# Altium PCB AAS_touch_board_rev1_0.PcbDoc
Units mm, origin at the board's own origin, x right, y up, seen from the top; angles counter-clockwise.
Board outline 59.53 x 59.4 mm, 2 copper layers (Component Side, Bottom Layer), stack 0.971 mm thick; 5 components, 7 nets, 12 pads, 4 vias.
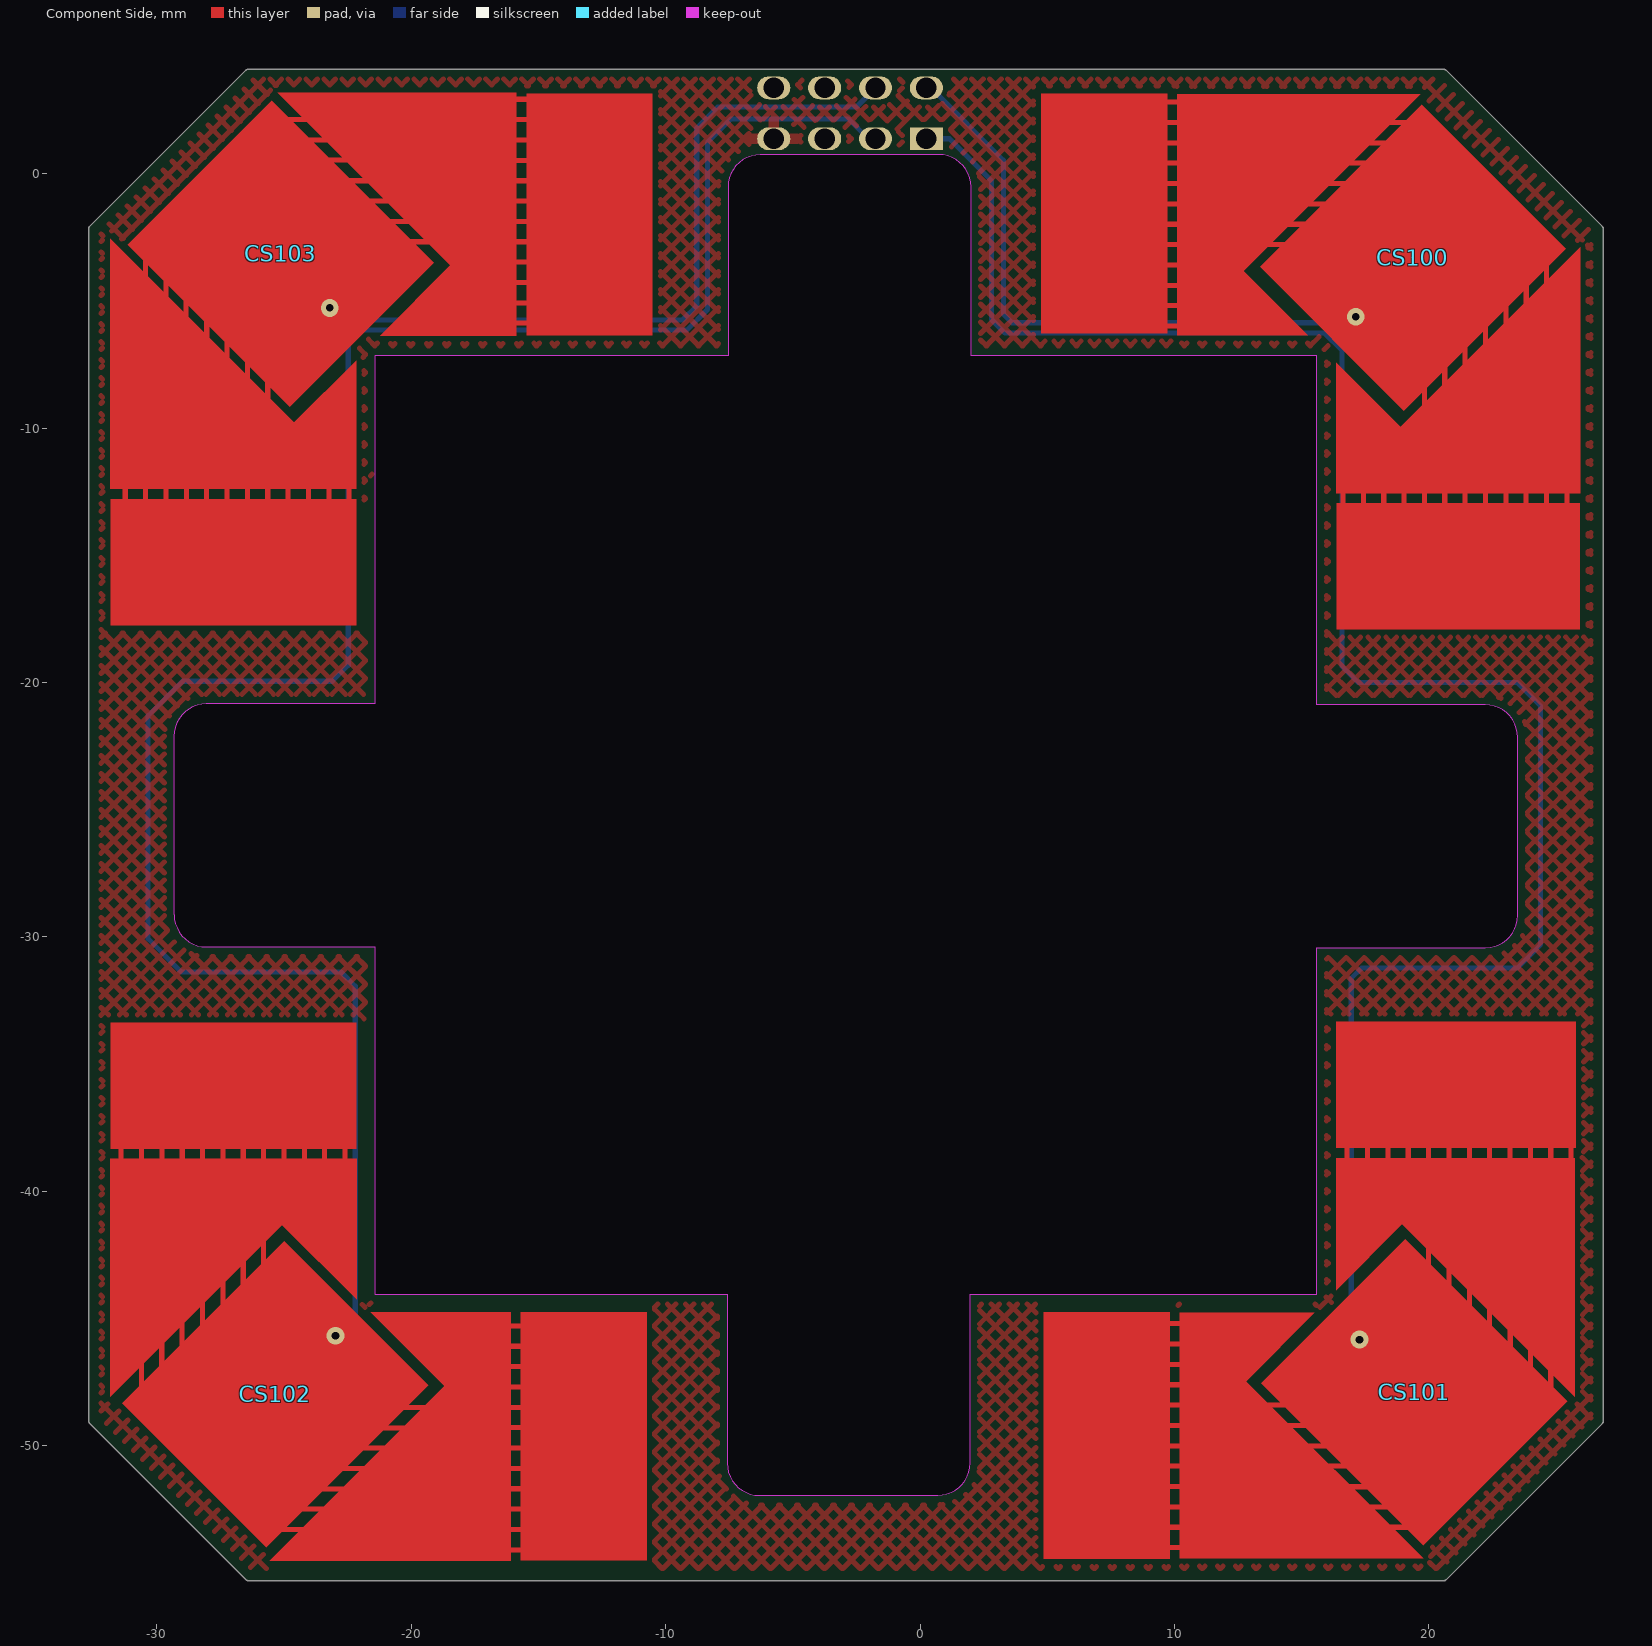
[diagram p0: Component Side view]
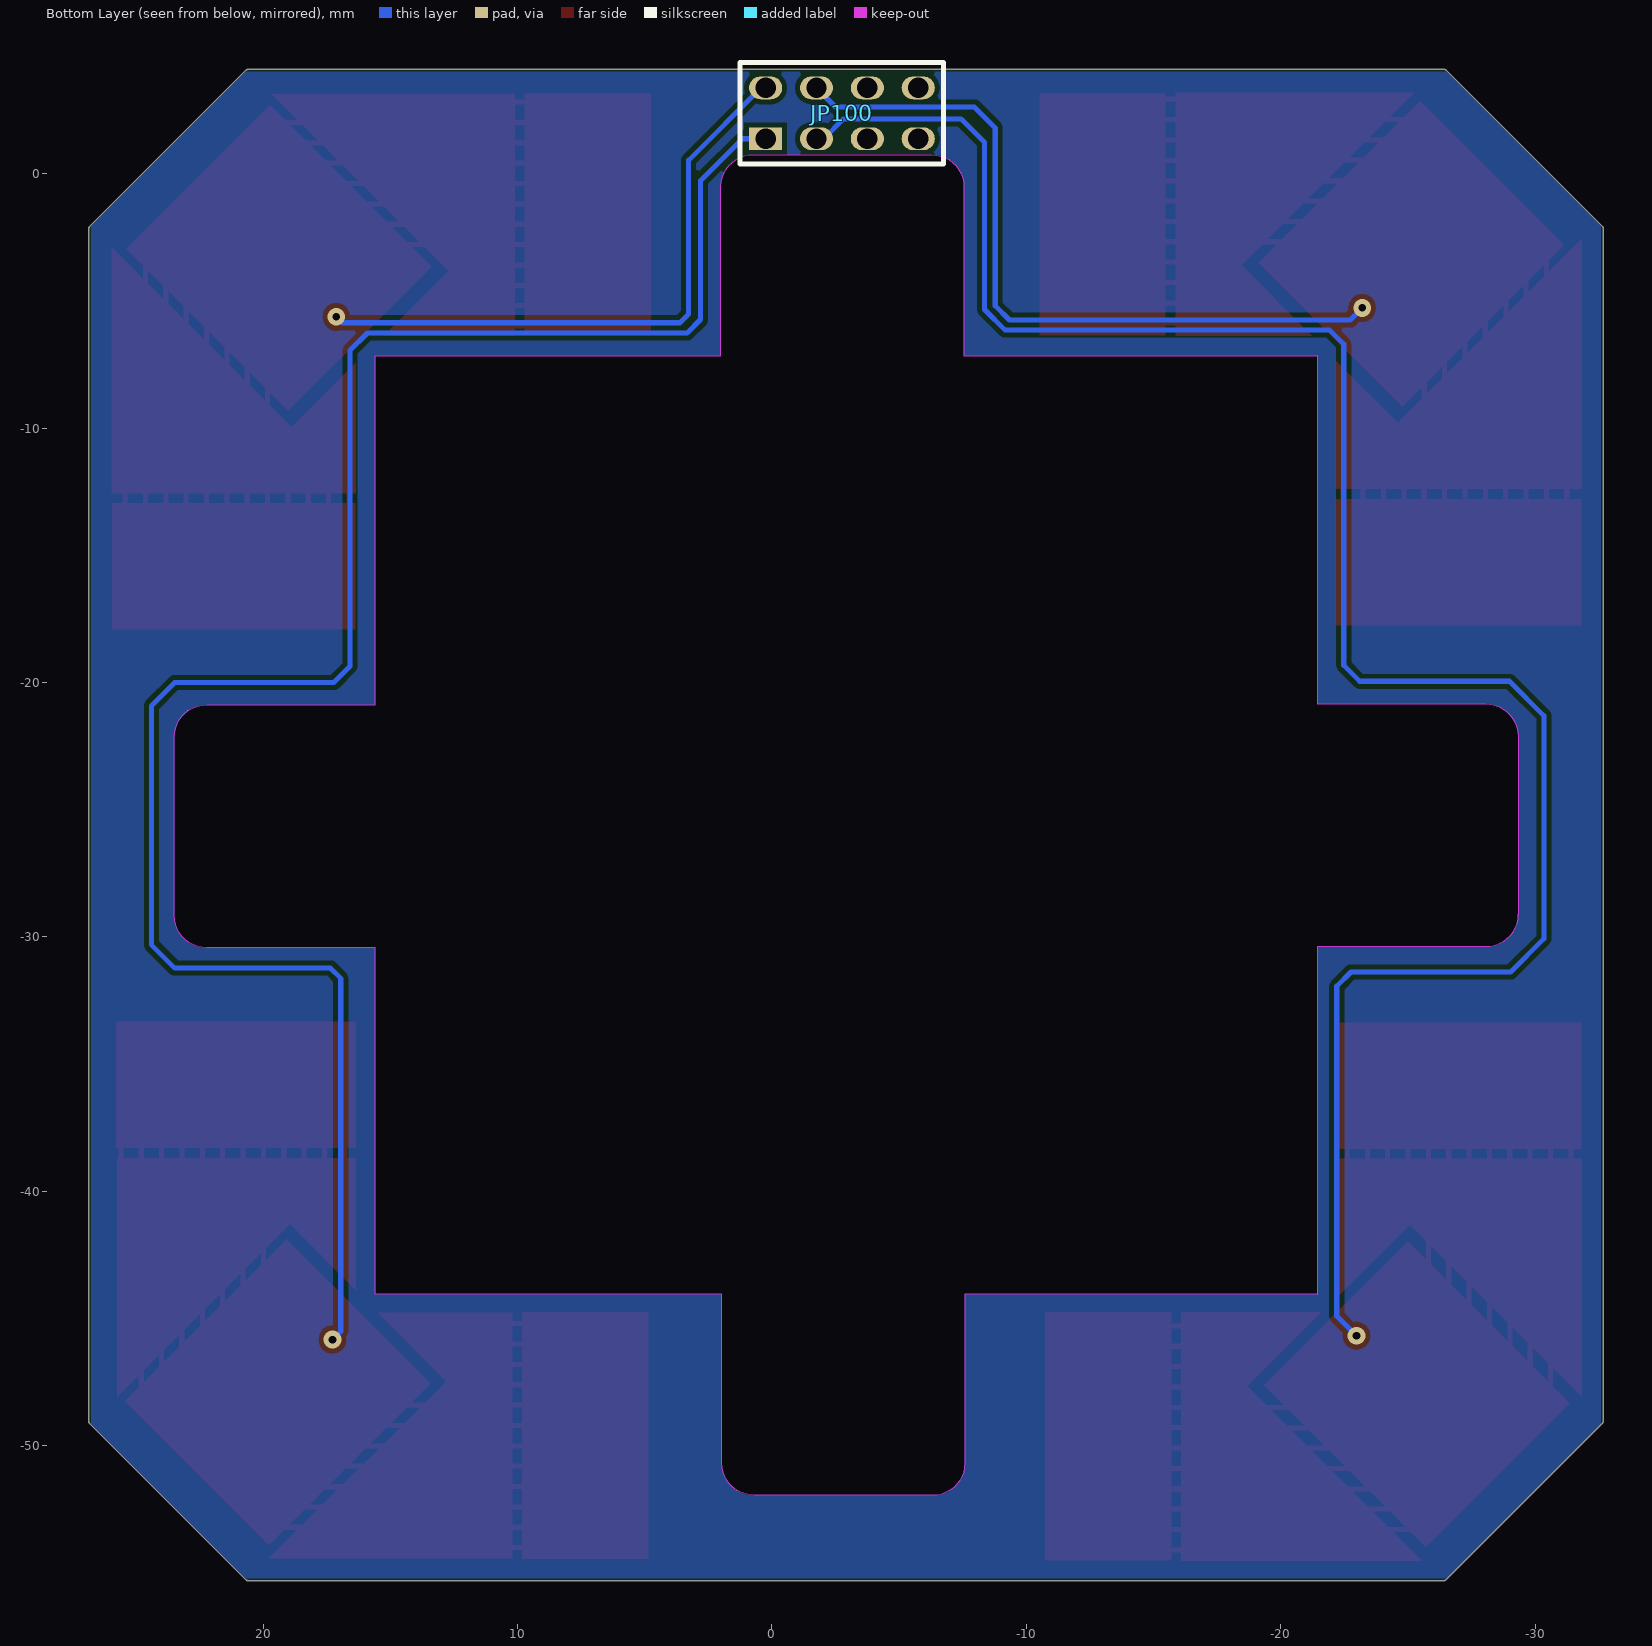
[diagram p1: Bottom Layer view, seen from below]

## Layer stack, top to bottom
Top Solder: solder mask 0.0102, Solder Resist, Dk 3.5
Component Side: signal copper 0.0356
Dielectric 1: core 0.9, FR-4, Dk 4.2
Bottom Layer: signal copper 0.0356
Solder Side: solder mask 0.0102, Solder Resist, Dk 3.5

## Board outline
-32.67,-22.751 cw(c-32.57,-22.75) -32.67,-22.75 -32.67,-7.181 cw(c-32.575,-7.15) -32.675,-7.15 -32.675,-2.151 cw(c-32.575,-2.15) -32.646,-2.079 -26.496,4.071 cw(c-26.425,4) -26.425,4.1 -21.425,4.1 cw(c-21.425,4) -21.423,4.1 cw(c-21.42,4) -21.42,4.1 20.599,4.1 cw(c20.6,4) 20.671,4.071 26.821,-2.079 cw(c26.75,-2.15) 26.85,-2.15 26.85,-7.15 cw(c26.75,-7.15) 26.85,-7.153 cw(c26.75,-7.155) 26.85,-7.155 26.85,-28.575 26.85,-28.45 ccw(c26.75,-28.45) 26.85,-28.449 26.85,-28.45 26.85,-49.05 cw(c26.75,-49.05) 26.821,-49.121 20.671,-55.271 cw(c20.6,-55.2) 20.6,-55.3 15.6,-55.3 cw(c15.6,-55.2) 15.569,-55.295 -21.389,-55.295 cw(c-21.42,-55.2) -21.42,-55.3 -26.42,-55.3 cw(c-26.42,-55.2) -26.507,-55.25 -32.641,-49.116 cw(c-32.57,-49.045) -32.67,-49.045
cut-out: -28.05,-30.39 -21.425,-30.39 -21.425,-44.05 -7.58,-44.05 -7.58,-50.68 ccw(c-6.31,-50.68) -6.31,-51.95 0.695,-51.95 0.7,-51.945 ccw(c0.7,-50.675) 1.97,-50.675 1.97,-44.05 15.595,-44.05 15.595,-30.42 15.59,-30.425 22.225,-30.425 ccw(c22.225,-29.155) 23.495,-29.155 23.495,-22.15 23.49,-22.145 ccw(c22.22,-22.145) 22.22,-20.875 15.595,-20.875 15.595,-7.15 2.005,-7.15 2.005,-0.52 ccw(c0.735,-0.52) 0.735,0.75 -6.27,0.75 -6.275,0.745 ccw(c-6.275,-0.525) -7.545,-0.525 -7.545,-7.15 -21.425,-7.15 -21.425,-20.84 -28.055,-20.84 ccw(c-28.055,-22.11) -29.325,-22.11 -29.325,-29.115 -29.32,-29.12 ccw(c-28.05,-29.12)

## Design rules (kind name [scope] priority, off if disabled: settings)
Clearance pH_PROBE [InNetClass('pH_PROBE') vs not( HasFootprint('SOT-25') OR InNet('GND2'))] p1: gap=0.8 ignorepadtopadclearanceinfootprint=FALSE
Clearance "Polygons next to SMPS" [inPoly vs InNetClass('HIGH VOLTAGE')] p2: gap=0.2 ignorepadtopadclearanceinfootprint=FALSE
Clearance Outline [IsBoardCutoutRegion] p3: gap=0 ignorepadtopadclearanceinfootprint=FALSE
Clearance "Pod PMU" [HasFootprint('PMUE-R1.1')] p4: gap=0.2 ignorepadtopadclearanceinfootprint=FALSE
Clearance "AC Input - HV" [InNetClass('AC INPUT') vs InNetClass('HIGH VOLTAGE')] p5: gap=3.2 ignorepadtopadclearanceinfootprint=FALSE
Clearance HV-LV [InNetClass('HIGH VOLTAGE') vs not InNetClass('HIGH VOLTAGE')] p6: gap=8.2 ignorepadtopadclearanceinfootprint=FALSE
Clearance N [InNet('N') vs not( InNet('N') OR HasFootprint('R1206_S') OR InNet('NetR17_2'))] p7: gap=3 ignorepadtopadclearanceinfootprint=FALSE
Clearance "Relay COM and NO" [InNetClass('RELAY_COM') vs InNetClass('RELAY_NO')] p8: gap=1.5 ignorepadtopadclearanceinfootprint=FALSE
Clearance Global [All] p9: gap=0.2 ignorepadtopadclearanceinfootprint=FALSE except(0: Arc-Hole Track-Hole SMDPad-Hole THPad-Hole Via-Hole Fill-Hole Poly-Hole Region-Hole Text-Hole)
ComponentClearance ComponentClearance_2 [All] p1 off: gap=0.254 collisioncheckmode=3 verticalgap=0.254 showdistances=FALSE
ComponentClearance [All] p2 off: gap=0.254 collisioncheckmode=3 verticalgap=0.254 showdistances=FALSE
DiffPairsRouting ETHERNET_GAP [InDifferentialPairClass('ETHERNET')] p1: maxlimit=0.508 minlimit=0.305 mostfreqgap=0.305 toplayer_minwidth=0.152 toplayer_maxwidth=0.305 toplayer_prefwidth=0.305 bottomlayer_minwidth=0.152 bottomlayer_maxwidth=0.305 bottomlayer_prefwidth=0.305 maxuncoupledlength=10
DiffPairsRouting USB_GAP [InDifferentialPairClass('USB')] p2: maxlimit=0.508 minlimit=0.203 mostfreqgap=0.305 toplayer_minwidth=0.152 toplayer_maxwidth=0.203 toplayer_prefwidth=0.203 bottomlayer_minwidth=0.152 bottomlayer_maxwidth=0.203 bottomlayer_prefwidth=0.203 maxuncoupledlength=10
FabricationTestPointUsage TestPointUsage [All] p1: valid=0 allowmultiple=FALSE
FabricationTestpoint Testpoint [All] p1: side=3 testpointundercomponent=TRUE minsize=1.016 maxsize=2.54 preferedsize=1.524 minholesize=0.508 maxholesize=1.016 preferedholesize=0.813 testpointgrid=0.025 allowsidetop=TRUE allowsidebottom=TRUE usegrid=TRUE gridtolerance=0
Height [All] p1: minheight=0 maxheight=35 prefheight=12.7
HoleSize [All] p1: absolutevalues=TRUE maxlimit=6 minlimit=0.3 maxpercent=80.000 minpercent=20.000
MaxMinImpedance [InNetClass('HDMI')] p1: minimum=90,00 maximum=110,0
MinimumSolderMaskSliver [All] p1: minsoldermaskwidth=0.145
PolygonConnect DIODE [IsNamedPolygon('NETC18_1_L01_P010')  OR IsNamedPolygon('NETC18_1_L02_P011')    OR IsNamedPolygon('NETC22_1_L01_P015')    OR IsNamedPolygon('DIODE_C_BOTTOM')] p1: connectstyle=Direct reliefconductorwidth=0.254 reliefentries=4 polygonreliefangle="90 Angle" airgapwidth=0.254
PolygonConnect "Spacer holes" [(ObjectKind = 'Pad') And (Net = 'GND') And (AsMM(HoleDiameter) = 2)] p2: connectstyle=Direct reliefconductorwidth=0.254 reliefentries=4 polygonreliefangle="90 Angle" airgapwidth=0.254
PolygonConnect [All] p3: thpad.connectstyle=Relief thpad.reliefconductorwidth=0.4 thpad.reliefentries=4 thpad.polygonreliefangle="90 Angle" thpad.airgapwidth=0.254 smdpad.connectstyle=Relief smdpad.reliefconductorwidth=0.25 smdpad.reliefentries=4 smdpad.polygonreliefangle="90 Angle" smdpad.airgapwidth=0.2 via.connectstyle=Direct via.reliefconductorwidth=0.254 via.reliefentries=4 via.polygonreliefangle="90 Angle" via.airgapwidth=0.254
RoomDefinition AAS_touch_board_rev1_0 [InComponentClass('AAS_touch_board_rev1_0')] p1: confinementstyle=ConfineOut formatcopy=TRUE lockcomponents=FALSE outline -39.652,-247.425 56.625,-247.425 56.625,-235.941 -39.652,-235.941
RoutingVias [All] p1: holewidth=0.3 width=0.7 viastyle="Through Hole" minholewidth=0.3 minwidth=0.6 maxholewidth=1.1 maxwidth=2.4
ShortCircuit "POD MERICIM MODULEM" [HasFootprint('PMUE-R1.1')] p1: allowed=TRUE
ShortCircuit [All] p2: allowed=FALSE
SilkToSilkClearance [All] p1: silktosilkclearance=0
SilkToSolderMaskClearance [IsPad] p1: minsilkscreentomaskgap=0 clearancetoexposedcopper=TRUE
SolderMaskExpansion [All] p1: expansion=0.102
Width [All] p1: maxlimit=5 minlimit=0.15 preferedwidth=0.2
20 further rules are at their usual default settings.

## Components (designator, comment, footprint, x,y, rotation, side; value= is the part's Value field where it differs from the comment)
CS100 "QTouch Button" ? 19.375,-3.3 r45 top
CS101 "QTouch Button" ? 19.425,-47.9 r135 top
CS102 "QTouch Button" ? -25.35,-47.975 r45 top
CS103 "QTouch Button" ? -25.125,-3.15 r315 top
JP100 "2X4" HDR2X4_P2 -2.75,2.375 r180 bottom

## Footprints (in the part's own frame and the unit in brackets; to place one, negate y for a bottom-side part, rotate by r counter-clockwise, add the part's x,y. Pads: shape width x height; smd on the part's side, far side on the other; paste and mask are expansions set on the pad)
HDR2X4_P2 [mm] "Header 2x4, pitch 2mm"
  rect 1.3x0.9 hole 0.8: 1(-3,-1)
  oval 1.3x0.9 hole 0.8: 2(-3,1) 3(-1,-1) 4(-1,1) 5(1,-1) 6(1,1) 7(3,-1) 8(3,1)
  silkscreen extent -4,-2 4,2, body extent -3.95,-2 3.95,2, height 6.01
? [mm]
  round 0.1 smd paste-0.05: 1(0,0)
  Component Side region: -4.5,-4 -4.5,4 4.5,4 4.5,-4 -4.5,-4

## Part data
CS100 CS101 CS102 CS103: library part QTouchButton, ConfigurationParameters==__sensorid[1]=width[12]=height[7]=, ConfiguratorName=ATMEL_TOUCH
JP100: library part "Header 2X4", "Header, 8-Pin, Dual row"

## Via types
v1: diameter 0.7, hole 0.3, Component Side to Bottom Layer, 4 vias

## Nets (pads, with @x,y where several pads share a name; then routed paths per layer and width w, separated by ;. In a path a pad name is that pad's centre, name@x,y a point inside that pad or via, vN(x,y) a via of type N, cw(c..) or ccw(c..) an arc to the next point about the centre after c; other vN are vias at no path point)
0: CS100.1 JP100.2 | length 24.3
  Bottom Layer w0.2: JP100.2 0.434,3.375 3.275,0.534 3.275,-5.519 3.614,-5.858 16.892,-5.858 v1(17.125,-5.625)
1: CS101.1 JP100.1 | length 75.6
  Bottom Layer w0.2: JP100.1 1.157,1.375 2.807,-0.275 2.807,-5.732 3.333,-6.258 15.901,-6.258 16.593,-6.95 16.593,-19.368 17.225,-20 23.475,-20 24.393,-20.918 24.393,-30.302 23.47,-31.225 17.35,-31.225 16.949,-31.626 16.949,-45.499 v1(17.275,-45.825)
2: CS102.1 JP100.3 | length 82.3
  Component Side w0.2: v1(-22.975,-45.675) -22.975,-45.775 -22.525,-46.225
  Bottom Layer w0.2: v1(-22.975,-45.675) -22.2,-44.9 -22.2,-31.939 -22.764,-31.375 -29.034,-31.375 -30.339,-30.07 -30.339,-21.303 -28.987,-19.95 -23.1,-19.95 -22.475,-19.325 -22.475,-6.704 -21.921,-6.15 -9.167,-6.15 -8.35,-5.333 -8.35,1.234 -7.428,2.156 -2.816,2.156 -2.035,1.375 JP100.3
3: CS103.1 JP100.4 | length 29.5
  Bottom Layer w0.2: v1(-23.2,-5.275) -22.725,-5.75 -9.333,-5.75 -8.775,-5.192 -8.775,1.8 -7.95,2.625 -2.5,2.625 JP100.4
4: JP100.5
5: JP100.6
G: JP100.7
pads on no net: JP100.8

## Polygon pours and split planes (outlines as drawn)
no net on Bottom Layer "Bottom Layer-No Net 2" (solid, pour order 28): -32.57,-49.145 -32.57,-2.046 -26.524,4 20.699,4 26.75,-2.051 26.75,-49.15 20.7,-55.2 -26.515,-55.2
G on Component Side "Component Side-G" (hatched 45Degree grid 0.5 track 0.2, pour order 34): -26.42,-55.195 20.605,-55.195 26.75,-49.05 26.75,-2.15 20.6,4 -26.425,4 -32.575,-2.15 -32.57,-2.155 -32.57,-49.045

## Other copper
Component Side:
  rectangle net 1: 24.689,-48.068 24.889,-46.593
  rectangle net 1: 23.889,-47.468 24.089,-45.993
  rectangle net 1: 23.1,-46.643 23.3,-45.168
  rectangle net 1: 22.285,-46.018 22.485,-44.543
  rectangle net 1: 21.489,-45.088 21.689,-43.613
  rectangle net 1: 20.689,-44.343 20.889,-42.868
  rectangle net 1: 19.889,-43.293 20.089,-41.818
  region net 2: -25.468,-53.189 -25.468,-53.389 -23.993,-53.389 -23.993,-53.189
  region net 2: -24.868,-52.389 -24.868,-52.589 -23.393,-52.589 -23.393,-52.389
  region net 2: -24.043,-51.6 -24.043,-51.8 -22.568,-51.8 -22.568,-51.6
  region net 2: -23.05,-50.8 -23.05,-51 -21.575,-51 -21.575,-50.8
  region net 2: -22.488,-49.989 -22.488,-50.189 -21.013,-50.189 -21.013,-49.989
  region net 2: -21.5,-49.2 -21.5,-49.4 -20.025,-49.4 -20.025,-49.2
  region net 2: -20.693,-48.389 -20.693,-48.589 -19.218,-48.589 -19.218,-48.389
  region net 3: -30.339,-3.007 -30.539,-3.007 -30.539,-4.482 -30.339,-4.482
  region net 3: -29.539,-3.607 -29.739,-3.607 -29.739,-5.082 -29.539,-5.082
  region net 3: -28.75,-4.432 -28.95,-4.432 -28.95,-5.907 -28.75,-5.907
  region net 3: -27.935,-5.057 -28.135,-5.057 -28.135,-6.532 -27.935,-6.532
  region net 3: -27.139,-5.987 -27.339,-5.987 -27.339,-7.462 -27.139,-7.462
  region net 3: -26.339,-6.732 -26.539,-6.732 -26.539,-8.207 -26.339,-8.207
  region net 3: -25.539,-7.782 -25.739,-7.782 -25.739,-9.257 -25.539,-9.257
  region net 0: 14.718,-2.886 14.718,-2.686 13.243,-2.686 13.243,-2.886
  region net 0: 15.768,-2.086 15.768,-1.886 14.293,-1.886 14.293,-2.086
  region net 0: 16.513,-1.286 16.513,-1.086 15.038,-1.086 15.038,-1.286
  region net 0: 17.443,-0.49 17.443,-0.29 15.968,-0.29 15.968,-0.49
  region net 0: 18.068,0.325 18.068,0.525 16.593,0.525 16.593,0.325
  region net 0: 18.893,1.114 18.893,1.314 17.418,1.314 17.418,1.114
  region net 0: 19.493,1.914 19.493,2.114 18.018,2.114 18.018,1.914
  region net 3: -22.339,-11.857 -22.539,-11.857 -22.539,-13.332 -22.339,-13.332
  region net 3: -23.139,-11.857 -23.339,-11.857 -23.339,-13.332 -23.139,-13.332
  region net 3: -23.939,-11.857 -24.139,-11.857 -24.139,-13.332 -23.939,-13.332
  region net 3: -24.739,-11.857 -24.939,-11.857 -24.939,-13.332 -24.739,-13.332
  region net 3: -25.539,-11.857 -25.739,-11.857 -25.739,-13.332 -25.539,-13.332
  region net 3: -26.339,-11.857 -26.539,-11.857 -26.539,-13.332 -26.339,-13.332
  region net 3: -27.139,-11.857 -27.339,-11.857 -27.339,-13.332 -27.139,-13.332
  region net 3: -29.539,-11.857 -29.739,-11.857 -29.739,-13.332 -29.539,-13.332
  region net 3: -28.739,-11.857 -28.939,-11.857 -28.939,-13.332 -28.739,-13.332
  region net 3: -27.939,-11.857 -28.139,-11.857 -28.139,-13.332 -27.939,-13.332
  region net 3: -31.139,-11.857 -31.339,-11.857 -31.339,-13.332 -31.139,-13.332
  region net 3: -30.339,-11.857 -30.539,-11.857 -30.539,-13.332 -30.339,-13.332
  region net 2: -16.618,-45.189 -16.618,-45.389 -15.143,-45.389 -15.143,-45.189
  region net 2: -16.618,-45.989 -16.618,-46.189 -15.143,-46.189 -15.143,-45.989
  region net 2: -16.618,-46.789 -16.618,-46.989 -15.143,-46.989 -15.143,-46.789
  region net 2: -16.618,-47.589 -16.618,-47.789 -15.143,-47.789 -15.143,-47.589
  region net 2: -16.618,-48.389 -16.618,-48.589 -15.143,-48.589 -15.143,-48.389
  region net 2: -16.618,-49.189 -16.618,-49.389 -15.143,-49.389 -15.143,-49.189
  region net 2: -16.618,-49.989 -16.618,-50.189 -15.143,-50.189 -15.143,-49.989
  region net 2: -16.618,-52.389 -16.618,-52.589 -15.143,-52.589 -15.143,-52.389
  region net 2: -16.618,-51.589 -16.618,-51.789 -15.143,-51.789 -15.143,-51.589
  region net 2: -16.618,-50.789 -16.618,-50.989 -15.143,-50.989 -15.143,-50.789
  region net 2: -16.618,-53.989 -16.618,-54.189 -15.143,-54.189 -15.143,-53.989
  region net 2: -16.618,-53.189 -16.618,-53.389 -15.143,-53.389 -15.143,-53.189
  rectangle net 1: 16.689,-39.218 16.889,-37.743
  rectangle net 1: 17.489,-39.218 17.689,-37.743
  rectangle net 1: 18.289,-39.218 18.489,-37.743
  rectangle net 1: 19.089,-39.218 19.289,-37.743
  rectangle net 1: 19.889,-39.218 20.089,-37.743
  rectangle net 1: 20.689,-39.218 20.889,-37.743
  rectangle net 1: 21.489,-39.218 21.689,-37.743
  rectangle net 1: 23.889,-39.218 24.089,-37.743
  rectangle net 1: 23.089,-39.218 23.289,-37.743
  rectangle net 1: 22.289,-39.218 22.489,-37.743
  rectangle net 1: 25.489,-39.218 25.689,-37.743
  rectangle net 1: 24.689,-39.218 24.889,-37.743
  region net 0: 10.643,-6.086 10.643,-5.886 9.168,-5.886 9.168,-6.086
  region net 0: 10.643,-5.286 10.643,-5.086 9.168,-5.086 9.168,-5.286
  region net 0: 10.643,-4.486 10.643,-4.286 9.168,-4.286 9.168,-4.486
  region net 0: 10.643,-3.686 10.643,-3.486 9.168,-3.486 9.168,-3.686
  region net 0: 10.643,-2.886 10.643,-2.686 9.168,-2.686 9.168,-2.886
  region net 0: 10.643,-2.086 10.643,-1.886 9.168,-1.886 9.168,-2.086
  region net 0: 10.643,-1.286 10.643,-1.086 9.168,-1.086 9.168,-1.286
  region net 0: 10.643,1.114 10.643,1.314 9.168,1.314 9.168,1.114
  region net 0: 10.643,0.314 10.643,0.514 9.168,0.514 9.168,0.314
  region net 0: 10.643,-0.486 10.643,-0.286 9.168,-0.286 9.168,-0.486
  region net 0: 10.643,2.714 10.643,2.914 9.168,2.914 9.168,2.714
  region net 0: 10.643,1.914 10.643,2.114 9.168,2.114 9.168,1.914
  region net 3: -14.95,-5.975 -14.95,-5.775 -16.425,-5.775 -16.425,-5.975
  region net 3: -14.95,-5.175 -14.95,-4.975 -16.425,-4.975 -16.425,-5.175
  region net 3: -14.95,-4.375 -14.95,-4.175 -16.425,-4.175 -16.425,-4.375
  region net 3: -14.95,-3.575 -14.95,-3.375 -16.425,-3.375 -16.425,-3.575
  region net 3: -14.95,-2.775 -14.95,-2.575 -16.425,-2.575 -16.425,-2.775
  region net 3: -14.95,-1.975 -14.95,-1.775 -16.425,-1.775 -16.425,-1.975
  region net 3: -14.95,-1.175 -14.95,-0.975 -16.425,-0.975 -16.425,-1.175
  region net 3: -14.95,1.225 -14.95,1.425 -16.425,1.425 -16.425,1.225
  region net 3: -14.95,0.425 -14.95,0.625 -16.425,0.625 -16.425,0.425
  region net 3: -14.95,-0.375 -14.95,-0.175 -16.425,-0.175 -16.425,-0.375
  region net 3: -14.95,2.825 -14.95,3.025 -16.425,3.025 -16.425,2.825
  region net 3: -14.95,2.025 -14.95,2.225 -16.425,2.225 -16.425,2.025
  region net 3: -23.8,2.025 -23.8,2.225 -25.275,2.225 -25.275,2.025
  region net 3: -23.05,1.229 -23.05,1.429 -24.525,1.429 -24.525,1.229
  region net 3: -22.175,0.433 -22.175,0.633 -23.65,0.633 -23.65,0.433
  region net 3: -21.475,-0.375 -21.475,-0.175 -22.95,-0.175 -22.95,-0.375
  region net 3: -20.825,-1.175 -20.825,-0.975 -22.3,-0.975 -22.3,-1.175
  region net 3: -19.8,-1.975 -19.8,-1.775 -21.275,-1.775 -21.275,-1.975
  region net 3: -19.175,-2.775 -19.175,-2.575 -20.65,-2.575 -20.65,-2.775
  region net 2: -22.5,-37.8 -22.7,-37.8 -22.7,-39.275 -22.5,-39.275
  region net 2: -23.3,-37.8 -23.5,-37.8 -23.5,-39.275 -23.3,-39.275
  region net 2: -24.1,-37.8 -24.3,-37.8 -24.3,-39.275 -24.1,-39.275
  region net 2: -24.9,-37.8 -25.1,-37.8 -25.1,-39.275 -24.9,-39.275
  region net 2: -25.7,-37.8 -25.9,-37.8 -25.9,-39.275 -25.7,-39.275
  region net 2: -26.5,-37.8 -26.7,-37.8 -26.7,-39.275 -26.5,-39.275
  region net 2: -27.3,-37.8 -27.5,-37.8 -27.5,-39.275 -27.3,-39.275
  region net 2: -29.7,-37.8 -29.9,-37.8 -29.9,-39.275 -29.7,-39.275
  region net 2: -28.9,-37.8 -29.1,-37.8 -29.1,-39.275 -28.9,-39.275
  region net 2: -28.1,-37.8 -28.3,-37.8 -28.3,-39.275 -28.1,-39.275
  region net 2: -31.3,-37.8 -31.5,-37.8 -31.5,-39.275 -31.3,-39.275
  region net 2: -30.5,-37.8 -30.7,-37.8 -30.7,-39.275 -30.5,-39.275
  region net 2: -30.5,-46.65 -30.7,-46.65 -30.7,-48.125 -30.5,-48.125
  region net 2: -29.704,-45.9 -29.904,-45.9 -29.904,-47.375 -29.704,-47.375
  region net 2: -28.908,-45.025 -29.108,-45.025 -29.108,-46.5 -28.908,-46.5
  region net 2: -28.1,-44.325 -28.3,-44.325 -28.3,-45.8 -28.1,-45.8
  region net 2: -27.3,-43.55 -27.5,-43.55 -27.5,-45.025 -27.3,-45.025
  region net 2: -26.5,-42.65 -26.7,-42.65 -26.7,-44.125 -26.5,-44.125
  region net 2: -25.7,-41.9 -25.9,-41.9 -25.9,-43.375 -25.7,-43.375
  region net 1: 9.3,-45.1 9.3,-45.3 10.775,-45.3 10.775,-45.1
  region net 1: 9.3,-45.9 9.3,-46.1 10.775,-46.1 10.775,-45.9
  region net 1: 9.3,-46.7 9.3,-46.9 10.775,-46.9 10.775,-46.7
  region net 1: 9.3,-47.5 9.3,-47.7 10.775,-47.7 10.775,-47.5
  region net 1: 9.3,-48.3 9.3,-48.5 10.775,-48.5 10.775,-48.3
  region net 1: 9.3,-49.1 9.3,-49.3 10.775,-49.3 10.775,-49.1
  region net 1: 9.3,-49.9 9.3,-50.1 10.775,-50.1 10.775,-49.9
  region net 1: 9.3,-52.3 9.3,-52.5 10.775,-52.5 10.775,-52.3
  region net 1: 9.3,-51.5 9.3,-51.7 10.775,-51.7 10.775,-51.5
  region net 1: 9.3,-50.7 9.3,-50.9 10.775,-50.9 10.775,-50.7
  region net 1: 9.3,-53.9 9.3,-54.1 10.775,-54.1 10.775,-53.9
  region net 1: 9.3,-53.1 9.3,-53.3 10.775,-53.3 10.775,-53.1
  region net 1: 18.15,-53.1 18.15,-53.3 19.625,-53.3 19.625,-53.1
  region net 1: 17.4,-52.304 17.4,-52.504 18.875,-52.504 18.875,-52.304
  region net 1: 16.525,-51.508 16.525,-51.708 18,-51.708 18,-51.508
  region net 1: 15.825,-50.7 15.825,-50.9 17.3,-50.9 17.3,-50.7
  region net 1: 15.175,-49.9 15.175,-50.1 16.65,-50.1 16.65,-49.9
  region net 1: 14.15,-49.1 14.15,-49.3 15.625,-49.3 15.625,-49.1
  region net 1: 13.525,-48.3 13.525,-48.5 15,-48.5 15,-48.3
  rectangle net 0: 19.725,-9.25 19.925,-7.775
  rectangle net 0: 20.525,-8.625 20.725,-7.15
  rectangle net 0: 21.325,-7.6 21.525,-6.125
  rectangle net 0: 22.125,-6.95 22.325,-5.475
  rectangle net 0: 22.933,-6.25 23.133,-4.775
  rectangle net 0: 23.729,-5.375 23.929,-3.9
  rectangle net 0: 24.525,-4.625 24.725,-3.15
  rectangle net 0: 24.525,-13.475 24.725,-12
  rectangle net 0: 25.325,-13.475 25.525,-12
  rectangle net 0: 22.125,-13.475 22.325,-12
  rectangle net 0: 22.925,-13.475 23.125,-12
  rectangle net 0: 23.725,-13.475 23.925,-12
  rectangle net 0: 21.325,-13.475 21.525,-12
  rectangle net 0: 20.525,-13.475 20.725,-12
  rectangle net 0: 19.725,-13.475 19.925,-12
  rectangle net 0: 18.925,-13.475 19.125,-12
  rectangle net 0: 18.125,-13.475 18.325,-12
  rectangle net 0: 17.325,-13.475 17.525,-12
  rectangle net 0: 16.525,-13.475 16.725,-12
  region net 3: -10.507,3.154 -15.475,3.154 -15.475,-6.35 -10.507,-6.35
  region net 3: -22.15,-17.75 -22.15,-12.782 -31.825,-12.782 -31.825,-17.75
  region net 0: 25.95,-17.918 25.95,-12.95 16.361,-12.95 16.361,-17.918
  rectangle net 0: 4.75,-6.282 9.718,3.154
  region net 2: -31.825,-33.357 -31.825,-38.325 -22.15,-38.325 -22.15,-33.357
  region net 2: -10.732,-44.75 -15.7,-44.75 -15.7,-54.514 -10.732,-54.514
  region net 1: 16.35,-33.325 16.35,-38.293 25.774,-38.293 25.774,-33.325
  rectangle net 1: 4.857,-54.45 9.825,-44.743
  pour cut-out: -28.05,-30.766 cw(c-28.05,-29.12) -29.694,-29.183 cw(c-29.325,-29.115) -29.7,-29.115 -29.7,-22.11 cw(c-28.055,-22.11) -28.055,-20.465 -21.796,-20.465 -21.8,-15.107 -21.794,-11.875 -21.05,-11.875 -21.049,-15.106 -21.045,-20.84 cw(c-21.42,-20.84) -21.42,-21.216 -28.055,-21.216 ccw(c-28.055,-22.11) -28.95,-22.11 -28.95,-29.059 cw(c-29.31,-29.119) -28.945,-29.12 ccw(c-28.05,-29.12) -28.05,-30.015 -21.425,-30.015 cw(c-21.425,-30.39) -21.05,-30.39 -21.05,-43.675 -7.641,-43.675 cw(c-7.58,-44.045) -7.205,-44.045 -7.205,-50.68 ccw(c-6.31,-50.68) -6.31,-51.575 0.639,-51.575 cw(c0.699,-51.937) 0.7,-51.57 ccw(c0.7,-50.675) 1.595,-50.675 1.595,-44.05 cw(c1.97,-44.05) 1.97,-43.675 15.22,-43.675 15.22,-30.486 cw(c15.59,-30.425) 15.327,-30.157 cw(c15.595,-30.42) 15.656,-30.05 22.225,-30.05 ccw(c22.225,-29.155) 23.12,-29.155 23.12,-22.206 cw(c23.491,-22.145) 23.115,-22.145 ccw(c22.22,-22.145) 22.22,-21.25 15.595,-21.25 cw(c15.595,-20.875) 15.22,-20.875 15.22,-7.525 2.066,-7.525 cw(c2.005,-7.155) 1.629,-7.155 1.629,-0.52 ccw(c0.735,-0.52) 0.735,0.375 -6.214,0.375 cw(c-6.275,0.744) -6.275,0.37 ccw(c-6.275,-0.525) -7.17,-0.525 -7.17,-7.15 cw(c-7.545,-7.15) -7.545,-7.525 -21.054,-7.525 -21.051,-11.75 -21.787,-11.753 -21.805,-7.15 cw(c-21.43,-7.15) -21.43,-6.775 -7.921,-6.775 -7.921,-0.525 cw(c-6.275,-0.525) -6.338,1.119 cw(c-6.271,0.757) -6.27,1.125 0.735,1.125 cw(c0.735,-0.52) 2.38,-0.52 2.38,-6.775 15.595,-6.775 cw(c15.595,-7.15) 15.97,-7.15 15.97,-20.5 22.22,-20.5 cw(c22.22,-22.145) 23.864,-22.082 cw(c23.504,-22.149) 23.87,-22.15 23.87,-29.155 cw(c22.225,-29.155) 22.225,-30.8 15.97,-30.8 15.97,-44.05 cw(c15.595,-44.05) 15.595,-44.425 2.345,-44.425 2.345,-50.675 cw(c0.7,-50.675) 0.763,-52.319 cw(c0.695,-51.951) 0.695,-52.325 -6.31,-52.325 cw(c-6.31,-50.68) -7.955,-50.68 -7.955,-44.425 -21.425,-44.425 cw(c-21.425,-44.05) -21.8,-44.05 -21.8,-30.766
  pour cut-out: -32.835,-49.315 -26.685,-55.465 ccw(c-26.42,-55.2) -26.42,-55.575 8.094,-55.575 8.094,-54.825 -26.265,-54.825 -32.195,-48.895 -32.195,-2.3 -26.17,3.725 20.345,3.725 26.375,-2.305 26.375,-48.895 20.445,-54.825 8.05,-54.825 8.05,-55.575 20.6,-55.575 ccw(c20.6,-55.2) 20.865,-55.465 27.015,-49.315 ccw(c26.75,-49.05) 27.125,-49.05 27.125,-2.15 ccw(c26.75,-2.15) 27.015,-1.885 20.765,4.365 ccw(c20.5,4.101) 20.5,4.475 -26.325,4.475 ccw(c-26.325,4.1) -26.59,4.365 -32.835,-1.88 ccw(c-32.57,-2.145) -32.945,-2.145 -32.945,-49.05 ccw(c-32.57,-49.05)
  region net 3: -25.25,3.175 -18.454,-3.621 -18.475,-3.621 -21.22,-6.366 -15.868,-6.366 -15.868,3.175
  region net 3: -22.169,-7.358 -24.607,-9.796 -24.607,-9.775 -31.825,-2.557 -31.825,-12.382 -22.169,-12.382
  region net 0: 25.95,-2.9 18.879,-9.971 18.879,-9.95 16.35,-7.421 16.35,-12.557 25.95,-12.557
  region net 0: 15.236,-6.35 12.704,-3.818 12.725,-3.818 19.67,3.127 10.118,3.127 10.118,-6.35
  region net 2: -31.825,-48.075 -25.061,-41.311 -25.061,-41.332 -22.15,-44.243 -22.15,-38.725 -31.825,-38.725
  region net 2: -21.582,-44.743 -18.675,-47.65 -18.696,-47.65 -25.564,-54.518 -16.089,-54.518 -16.089,-44.743
  region net 1: 16.35,-43.886 18.957,-41.279 18.957,-41.3 25.725,-48.068 25.725,-38.693 16.35,-38.693
  region net 1: 19.775,-54.425 12.804,-47.454 12.825,-47.454 15.504,-44.775 10.218,-44.775 10.218,-54.425

## Silkscreen, mask and mechanical layers (free items; w line width, h text height)
Top popis dokumentac:
  lines w0.254: 12.1,88.077 85.05,88.077 ; 12.1,93.202 85.075,93.202 ; 56.107,82.375 56.107,88.077 ; 12.1,82.375 85.025,82.375 85.025,100.425 12.1,100.425 12.1,82.375
  text ".Pcb_File_Name_No_Path" at 13.619,95.358 h3
  text "Variant .VariantName" at 13.544,89.608 h2.03
  text ".Printout_Name" at 13.744,84.308 h2.03
  text ".Print_Date" at 57.25,84.175 h2.03
Bottom popis dokumentace:
  lines w0.254: 12.1,88.077 85.05,88.077 ; 12.1,93.202 85.075,93.202 ; 41.068,82.2 41.068,87.902 ; 12.1,82.2 85.075,82.2 85.075,100.25 12.1,100.25 12.1,82.2
  text ".Pcb_File_Name_No_Path" at 83.556,95.183 h3
  text "Variant .VariantName" at 83.631,89.433 h2.03
  text ".Printout_Name" at 83.431,84.133 h2.03
  text ".Print_Date" at 39.925,84 h2.03
Outline:
  lines w0.2: -32.575,-7.15 -32.575,-2.15 -26.425,4 -21.425,4 ; -32.57,-22.75 -32.57,-7.15 ; -32.57,-22.625 -32.57,-44.045 -32.57,-49.045 -26.42,-55.195 ; -29.32,-29.115 -29.32,-22.11 cw(c-28.05,-22.11) -28.05,-20.84 -21.415,-20.84 ; -29.315,-29.12 ccw(c-28.045,-29.12) -28.045,-30.39 -21.42,-30.39 -21.42,-44.05 -7.575,-44.05 ; -26.42,-55.2 -21.42,-55.2 ; -21.425,-7.15 -7.54,-7.15 -7.54,-0.525 cw(c-6.27,-0.525) -6.27,0.745 ; -21.42,-55.195 -5.82,-55.195 15.605,-55.195 ; -21.42,-20.84 -21.42,-7.15 ; -21.42,4 0,4 15.6,4 20.6,4 26.75,-2.15 26.75,-7.15 ; -7.575,-44.045 -7.575,-50.68 ccw(c-6.305,-50.68) -6.305,-51.95 0.7,-51.95 ; -6.265,0.75 0.74,0.75 cw(c0.74,-0.52) 2.01,-0.52 2.01,-7.155 ; 0.705,-51.945 ccw(c0.705,-50.675) 1.975,-50.675 1.975,-44.05 15.6,-44.05 15.6,-30.42 ; 2.01,-7.15 15.6,-7.15 15.6,-20.875 22.225,-20.875 cw(c22.225,-22.145) 23.495,-22.145 ; 15.595,-30.425 22.23,-30.425 ccw(c22.23,-29.155) 23.5,-29.155 23.5,-22.15 ; 15.6,-55.2 20.6,-55.2 26.75,-49.05 26.75,-44.05 26.75,-28.45 ; 26.75,-28.575 26.75,-7.155